# Altium PCB STMCamera.PcbDoc
Units mil, origin at the board's own origin, x right, y up, seen from the top; angles counter-clockwise.
Board outline 6000 x 4000 mil, 2 copper layers (Top Layer, Bottom Layer); 18 components, 10 nets, 140 pads, 1 vias.
Unrouted connection lines stored in the file: 41.
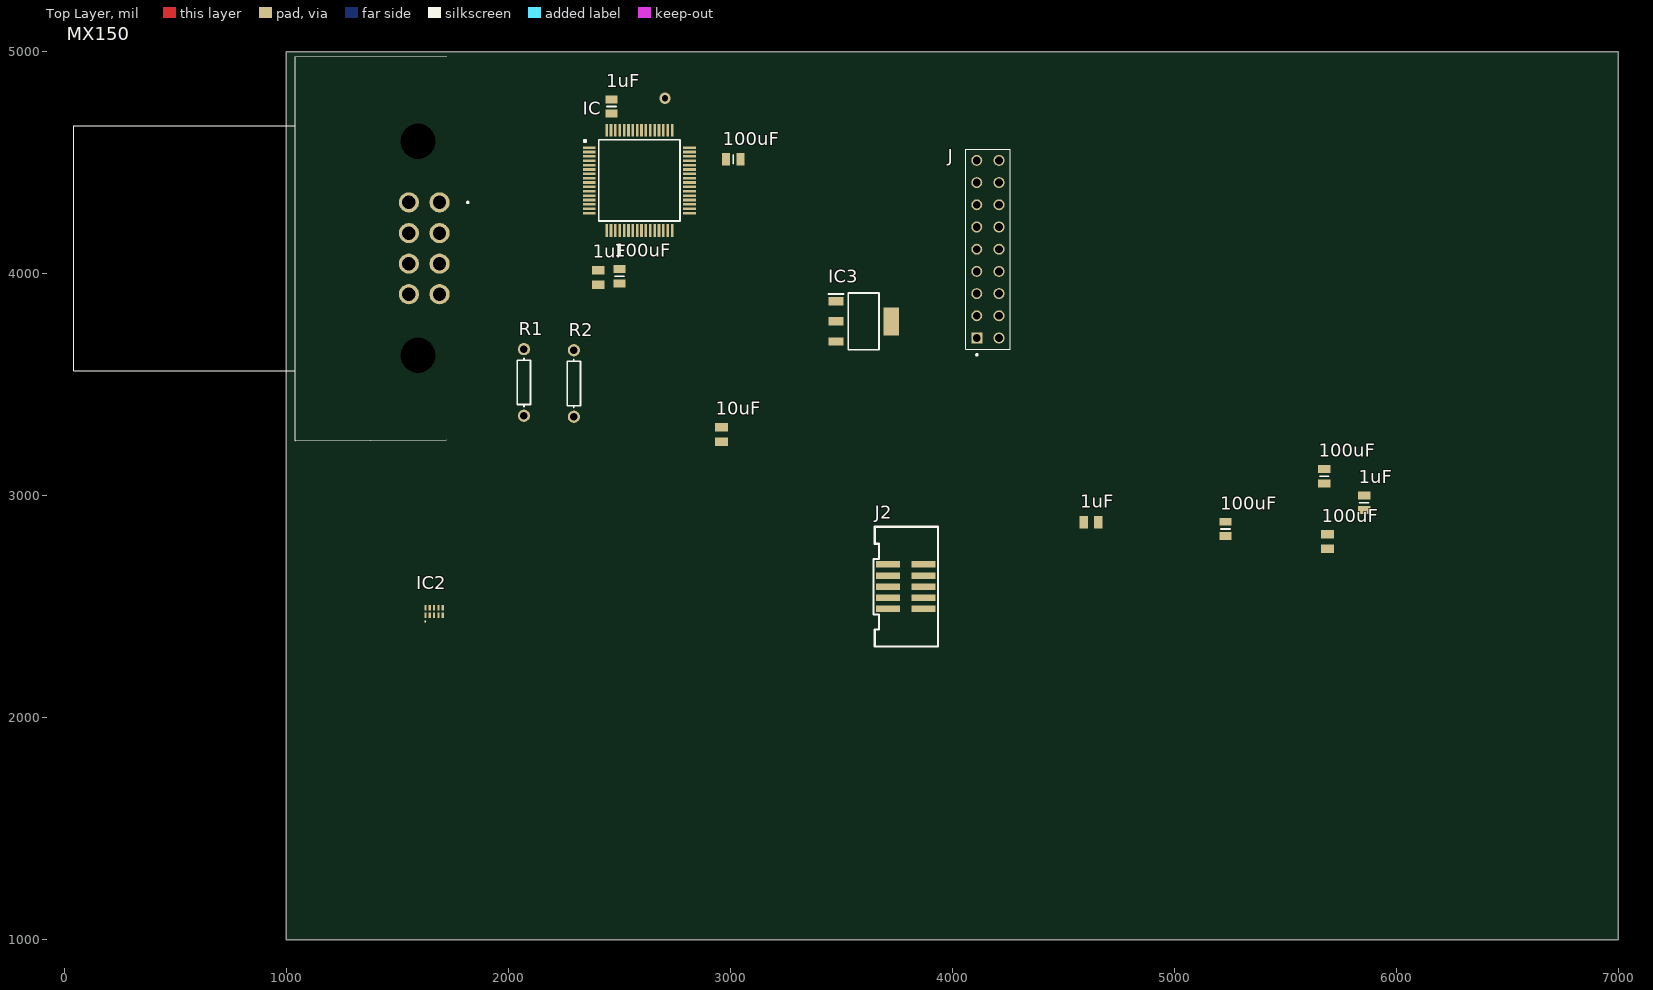
[diagram p0: Top Layer view]
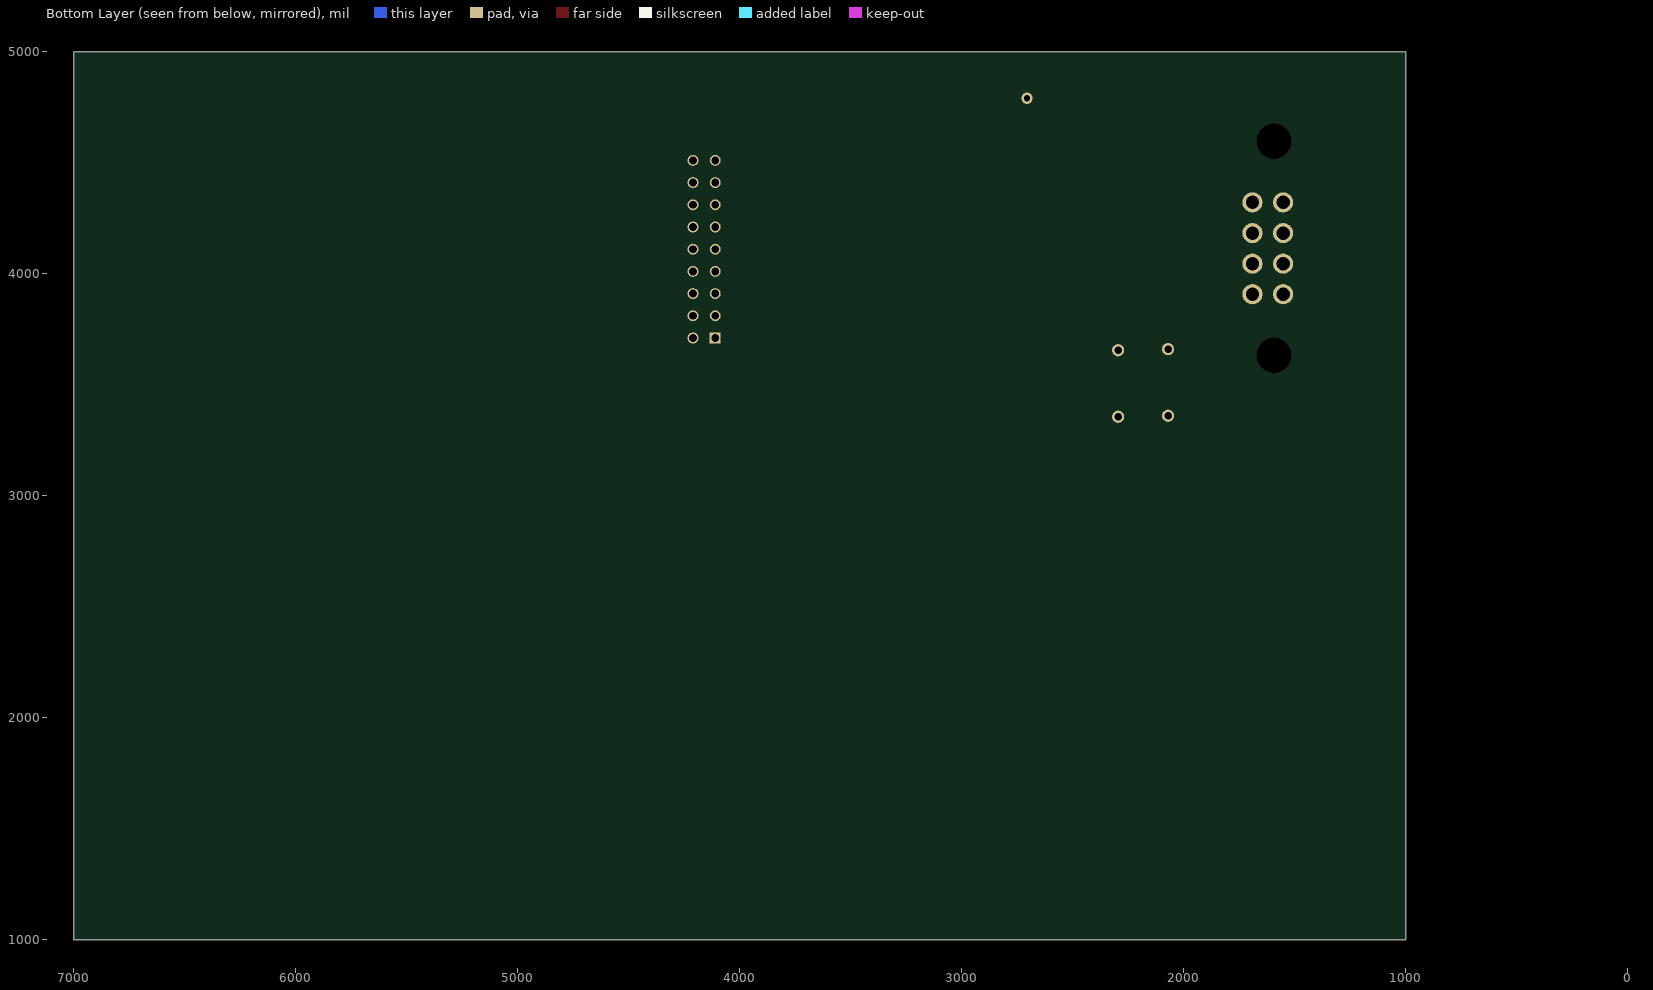
[diagram p1: Bottom Layer view, seen from below]

## Layer stack, top to bottom
Top Solder: solder mask 0.4, Solder Resist, Dk 3.5
Top Layer: signal copper 1.4
Dielectric 1: dielectric 12.6, FR-4, Dk 4.8
Bottom Layer: signal copper 1.4
Bottom Solder: solder mask 0.4, Solder Resist, Dk 3.5

## Board outline
1000,1000 7000,1000 7000,5000 1000,5000

## Design rules (kind name [scope] priority, off if disabled: settings)
Clearance [All] p1: gap=10 ignorepadtopadclearanceinfootprint=FALSE except(0: Arc-Hole Track-Hole SMDPad-Hole THPad-Hole Via-Hole Fill-Hole Poly-Hole Region-Hole Text-Hole; 5: Arc-Arc Arc-Track Arc-SMDPad Track-Track Track-SMDPad SMDPad-SMDPad)
PolygonConnect [All] p1: connectstyle=Relief reliefconductorwidth=10 reliefentries=4 polygonreliefangle="90 Angle" airgapwidth=10
RoutingVias [All] p1: holewidth=28 width=50 viastyle="Through Hole" minholewidth=28 minwidth=50 maxholewidth=28 maxwidth=50
SolderMaskExpansion [All] p1: expansion=4 istentingtop=FALSE
Width [All] p1: maxlimit=10 minlimit=10 preferedwidth=10
30 further rules are at their usual default settings.

## Classes and differential pairs
component class STM32Camera: 1uF 10uF 100uF IC IC2 IC3 J J2 MX150 R1 R2

## Components (designator, comment, footprint, x,y, rotation, side; value= is the part's Value field where it differs from the comment)
1uF "CL21B105KBFNNNE" CAPC2012X135N 5855,2967.72 r90 top
1uF "CL21B105KBFNNNE" CAPC2012X135N 2465,4752.72 r90 top
1uF "CL21B105KBFNNNE" CAPC2012X145N 4625,2880 r0 top
1uF "CL21B105KBFNNNE" CAPC2012X145N 2405,3982.32 r90 top
10uF "CL21A106KAYNNNE" CAPC2012X145N 2960,3275 r90 top
100uF "CL21B104KCFNNNE" CAPC2012X135N 5230,2850 r90 top
100uF "CL21B104KCFNNNE" CAPC2012X135N 3012.72,4515 r0 top
100uF "CL21B104KCFNNNE" CAPC2012X145N 5690,2792.32 r90 top
100uF "CL21B104KCFNNNE" CAPC2012X135N 2500,3987.72 r90 top
100uF "CL21B104KCFNNNE" CAPC2012X135N 5675,3087.28 r90 top
IC "STM32F072RBT6" QFP50P1200X1200X160-64N 2590,4420 r0 top
IC2 "PESD4USB5B-TBRX" PESD4USB5BTBRX 1665.32,2478.27 r0 top
IC3 "LM1117MPX-3.3_NOPB" SOT230P700X180-4N 3600,3785 r0 top
J "215309-9" TE_215309-9 4110,3710 r90 top
J2 "SHF-105-01-X-D-SM" SHF-105-01-X-D-SM 3790,2590 r90 top
MX150 "34830-0801" 348300801 1689.8,4320.59 r270 top
R1 "Res1" AXIAL-0.3 2070,3510 r90 top value=4.7K
R2 "Res1" AXIAL-0.3 2295,3505 r90 top value=4.7K

## Footprints (in the part's own frame and the unit in brackets; to place one, negate y for a bottom-side part, rotate by r counter-clockwise, add the part's x,y. Pads: shape width x height; smd on the part's side, far side on the other; paste and mask are expansions set on the pad)
348300801 [mm]
  round 2.31 hole 1.54: 1(0,0) 2(3.5,0) 3(7,0) 4(10.5,0) 5(0,-3.5) 6(3.5,-3.5) 7(7,-3.5) 8(10.5,-3.5)
  round 2.025 hole 4.05 unplated: MH1(-7,-2.46) MH2(17.5,-2.46)
  silkscreen extent -16.75,-41.86 27.25,3.33, body extent -16.1,-41.56 26.59,1, height 25.37
AXIAL-0.3 [mm] "Axial Device, Thru-Hole; 2 Leads; 0.3 in Pin Spacing"
  round 1.4 hole 0.85: 1(-3.81,0) 2(3.81,0)
  silkscreen extent -2.77,-0.76 2.77,0.76
CAPC2012X135N [mm]
  rect 0.91x1.39 smd: 1(-0.82,0) 2(0.82,0)
  silkscreen extent 0,-0.53 0,0.53, body extent -1,-0.63 1,0.63, height 1.35
CAPC2012X145N [mm]
  rect 0.97x1.47 smd: 1(-0.83,0) 2(0.83,0)
  body extent -1,-0.63 1,0.63, height 1.45
PESD4USB5BTBRX [mm]
  rect 0.25x0.6 smd: 1(-1,-0.425) 2(-0.5,-0.425) 3(0,-0.425) 4(0.5,-0.425) 5(1,-0.425) 6(1,0.425) 7(0.5,0.425) 8(0,0.425) 9(-0.5,0.425) 10(-1,0.425)
  silkscreen extent -1.05,-1.2 -0.95,-1.1, body extent -1.25,-0.5 1.25,0.5, height 0.9
QFP50P1200X1200X160-64N [mm]
  rect 1.475x0.3 smd: 1(-5.738,3.75) 2(-5.738,3.25) 3(-5.738,2.75) 4(-5.738,2.25) 5(-5.738,1.75) 6(-5.738,1.25) 7(-5.738,0.75) 8(-5.738,0.25) 9(-5.738,-0.25) 10(-5.738,-0.75) 11(-5.738,-1.25) 12(-5.738,-1.75) 13(-5.738,-2.25) 14(-5.738,-2.75) 15(-5.738,-3.25) 16(-5.738,-3.75) 33(5.738,-3.75) 34(5.738,-3.25) 35(5.738,-2.75) 36(5.738,-2.25) 37(5.738,-1.75) 38(5.738,-1.25) 39(5.738,-0.75) 40(5.738,-0.25) 41(5.738,0.25) 42(5.738,0.75) 43(5.738,1.25) 44(5.738,1.75) 45(5.738,2.25) 46(5.738,2.75) 47(5.738,3.25) 48(5.738,3.75)
  rect 0.3x1.475 smd: 17(-3.75,-5.738) 18(-3.25,-5.738) 19(-2.75,-5.738) 20(-2.25,-5.738) 21(-1.75,-5.738) 22(-1.25,-5.738) 23(-0.75,-5.738) 24(-0.25,-5.738) 25(0.25,-5.738) 26(0.75,-5.738) 27(1.25,-5.738) 28(1.75,-5.738) 29(2.25,-5.738) 30(2.75,-5.738) 31(3.25,-5.738) 32(3.75,-5.738) 49(3.75,5.738) 50(3.25,5.738) 51(2.75,5.738) 52(2.25,5.738) 53(1.75,5.738) 54(1.25,5.738) 55(0.75,5.738) 56(0.25,5.738) 57(-0.25,5.738) 58(-0.75,5.738) 59(-1.25,5.738) 60(-1.75,5.738) 61(-2.25,5.738) 62(-2.75,5.738) 63(-3.25,5.738) 64(-3.75,5.738)
  silkscreen extent -6.35,-4.65 4.65,4.65, body extent -6,-6 6,6, height 1.6
SHF-105-01-X-D-SM [mil]
  rect 29x110 smd mask+2: 1(-100,-80) 2(-100,80) 3(-50,-80) 4(-50,80) 5(0,-80) 6(0,80) 7(50,-80) 8(50,80) 9(100,-80) 10(100,80)
  silkscreen extent -270,-145 270,145
SOT230P700X180-4N [mm]
  rect 1.75x0.95 smd: 1(-3.15,2.3) 2(-3.15,0) 3(-3.15,-2.3)
  rect 1.75x3.2 smd: 4(3.15,0)
  silkscreen extent -4.03,-3.25 1.75,3.25, body extent -3.5,-3.25 3.5,3.25, height 1.68
TE_215309-9 [mm]
  rect 1.25x1.25 hole 0.9: 1(0,0)
  round 1.25 hole 0.9: 2(0,-2.54) 3(2.54,0) 4(2.54,-2.54) 5(5.08,0) 6(5.08,-2.54) 7(7.62,0) 8(7.62,-2.54) 9(10.16,0) 10(10.16,-2.54) 11(12.7,0) 12(12.7,-2.54) 13(15.24,0) 14(15.24,-2.54) 15(17.78,0) 16(17.78,-2.54) 17(20.32,0) 18(20.32,-2.54)
  silkscreen extent -2.02,-3.8 21.59,1.26

## Part data
1uF 1uF 1uF 1uF: "Capacitor", Manufacturer_Name="Samsung Electro-Mechanics", Mouser Part Number=187-CL21B105KBFNNNE, Arrow Part Number=CL21B105KBFNNNE, Arrow Price/Stock=https://www.arrow.com/en/products/cl21b105kbfnnne/samsung-electro-mechanics?region=europe, Datasheet Link=https://componentsearchengine.com/Datasheets/2/CL21B105KBFNNNE.pdf, Height=1.35mm, Manufacturer_Part_Number=CL21B105KBFNNNE, Mouser Price/Stock=https://www.mouser.co.uk/ProductDetail/Samsung-Electro-Mechanics/CL21B105KBFNNNE?qs=yOVawPpwOwmddQEBPU6Y9A%3D%3D
10uF: "Capacitor", Manufacturer_Name="Samsung Electro-Mechanics", Mouser Part Number=187-CL21A106KAYNNNE, Arrow Part Number=CL21A106KAYNNNE, Arrow Price/Stock=https://www.arrow.com/en/products/cl21a106kaynnne/samsung-electro-mechanics?region=nac, Datasheet Link=https://datasheet.datasheetarchive.com/originals/distributors/Datasheets_SAMA/6a45835c9b7400e9b49c55c38a8ff4a2.pdf, Height=1.45mm, Manufacturer_Part_Number=CL21A106KAYNNNE, Mouser Price/Stock=https://www.mouser.co.uk/ProductDetail/Samsung-Electro-Mechanics/CL21A106KAYNNNE?qs=yOVawPpwOwmTXAd4dJtNjA%3D%3D
100uF 100uF 100uF 100uF 100uF: "Capacitor", Manufacturer_Name="Samsung Electro-Mechanics", Mouser Part Number=187-CL21B104KCFNNNE, Arrow Part Number=CL21B104KCFNNNE, Arrow Price/Stock=https://www.arrow.com/en/products/cl21b104kcfnnne/samsung-electro-mechanics, Datasheet Link=https://datasheet.datasheetarchive.com/originals/distributors/DKDS-19/374389.pdf, Height=1.35mm, Manufacturer_Part_Number=CL21B104KCFNNNE, Mouser Price/Stock=https://www.mouser.co.uk/ProductDetail/Samsung-Electro-Mechanics/CL21B104KCFNNNE?qs=lptGheUA4EwiEGVRX9oguw%3D%3D
IC: "Integrated Circuit", Manufacturer_Name=STMicroelectronics, Mouser Part Number=511-STM32F072RBT6, Arrow Part Number=STM32F072RBT6, Arrow Price/Stock=https://www.arrow.com/en/products/stm32f072rbt6/stmicroelectronics, Datasheet Link=http://www.st.com/st-web-ui/static/active/en/resource/technical/document/datasheet/DM00090510.pdf, Height=1.6mm, Manufacturer_Part_Number=STM32F072RBT6, Mouser Price/Stock=https://www.mouser.co.uk/ProductDetail/STMicroelectronics/STM32F072RBT6?qs=xf9JV0PLFEcuk6sTlnutaw%3D%3D
IC2: "Integrated Circuit", Manufacturer_Name=Nexperia, Mouser Part Number=771-PESD4USB5B-TBRX, Datasheet Link=https://assets.nexperia.com/documents/data-sheet/PESD4USB5B-TBS.pdf, Height=0.8mm, Manufacturer_Part_Number=PESD4USB5B-TBRX, Mouser Price/Stock=https://www.mouser.co.uk/ProductDetail/Nexperia/PESD4USB5B-TBRX?qs=MyNHzdoqoQL1Wz6R0ceOBw%3D%3D
IC3: "Integrated Circuit", Arrow Part Number=LM1117MPX-3.3/NOPB, Manufacturer_Name="Texas Instruments", Mouser Part Number=926-LM1117MPX3.3NOPB, Arrow Price/Stock=https://www.arrow.com/en/products/lm1117mpx-3.3nopb/texas-instruments?region=nac, Datasheet Link=http://www.ti.com/lit/ds/symlink/lm1117.pdf, Height=1.8mm, Manufacturer_Part_Number=LM1117MPX-3.3/NOPB, Mouser Price/Stock=https://www.mouser.co.uk/ProductDetail/Texas-Instruments/LM1117MPX-3.3-NOPB?qs=X1J7HmVL2ZHRbBIxXi4utg%3D%3D
J: "2X9P HV100 REC CON. TE, 8.5MM", Package=None, Availability=Unavailable, Centerline_Pitch="2.54 mm[.1 in]", EU_RoHS_Compliance=Compliant, MF="TE Connectivity", MP=215309-9, Number_of_Positions=9, Price=None, Product_Type=Connector, SnapEDA_Link=https://www.snapeda.com/parts/215309-9/TE%20Connectivity%20AMP%20Connectors/view-part/1389782/?ref=snap, TE_purchase_URL=https://www.te.com/usa-en/product-215309-9.html?te_bu=Cor&te_type=disp&te_campaign=seda_glo_cor-seda-global-disp-prtnr-fy19-seda-model-bom-cta_sma-317_1&elqCampaignId=32493
J2: "0.05\"X0.05\" SHROUDED TERMINAL STRIP, 10 PINS.", MANUFACTURER=SAMTEC, CREATED="February 17, 2015 - Wendy Xin", PCB DECAL=SHF-105-01-X-D-SM
MX150: "Connector", Manufacturer_Name=Molex, Mouser Part Number=538-34830-0801, Datasheet Link=https://www.mouser.com/datasheet/2/276/0348300801_PCB_HEADERS-693677.pdf, Height=25.88mm, Manufacturer_Part_Number=34830-0801, Mouser Price/Stock=https://www.mouser.co.uk/ProductDetail/Molex/34830-0801?qs=PdnAIJ6Mlf2HM0lerKt%252BjA%3D%3D
R1 R2: "Resistor", LatestRevisionDate=17-Jul-2002, LatestRevisionNote="Re-released for DXP Platform.", PackageDescription="Axial Device, Thru-Hole; 2 Leads; 0.3 in Pin Spacing", PackageReference=AXIAL-0.3, Published=8-Jun-2000, Publisher="Altium Limited"

## Via types
v1: diameter 50, hole 28, Top Layer to Bottom Layer, 1 vias

## Nets (pads, with @x,y where several pads share a name; then routed paths per layer and width w, separated by ;. In a path a pad name is that pad's centre, name@x,y a point inside that pad or via, vN(x,y) a via of type N, cw(c..) or ccw(c..) an arc to the next point about the centre after c; other vN are vias at no path point)
3.3V: 1uF.1 1uF.2@5855,3000 10uF.2 100uF.1 100uF.2@5675,3119.57 100uF.2@5690,2825 IC2.3 IC3.1 IC3.2 IC3.4 IC.18 IC.31 IC.47 IC.63 IC.64 J2.1 J2.3 J2.9 MX150.8 R1.1 R2.1
5V: 10uF.1 IC2.1 IC3.3 MX150.5
CapPair: 1uF.2@2405,4015 1uF.2@2465,4785 1uF.2@4657.68,2880 100uF.2@2500,4020 100uF.2@3045,4515 100uF.2@5230,2882.28 IC.19 IC.32 IC.48
D+: IC2.2 MX150.6
D-: IC2.4 MX150.7
  other v1: 2705,4790
HSYNC: J.14
I2C2_SCL: R2.2
I2C2_SDA: R1.2
SWCLK: J2.4
SWDIO: J2.2
pads on no net: IC2.5 IC2.6 IC2.7 IC2.8 IC2.9 IC2.10 IC.1 IC.2 IC.3 IC.4 IC.5 IC.6 IC.7 IC.8 IC.9 IC.10 IC.11 IC.12 IC.13 IC.14 IC.15 IC.16 IC.17 IC.20 IC.21 IC.22 IC.23 IC.24 IC.25 IC.26 IC.27 IC.28 IC.29 IC.30 IC.33 IC.34 IC.35 IC.36 IC.37 IC.38 IC.39 IC.40 IC.41 IC.42 IC.43 IC.44 IC.45 IC.46 IC.49 IC.50 IC.51 IC.52 IC.53 IC.54 IC.55 IC.56 IC.57 IC.58 IC.59 IC.60 IC.61 IC.62 J2.5 J2.6 J2.7 J2.8 J2.10 J.1 J.2 J.3 J.4 J.5 J.6 J.7 J.8 J.9 J.10 J.11 J.12 J.13 J.15 J.16 J.17 J.18 MX150.1 MX150.2 MX150.3 MX150.4 MX150.MH1 MX150.MH2

## Text inside footprints (layer, text, board x,y; h text height)
J2: Mechanical 1 "J1" at 3810,2570.43 h30 r90